# EAGLE board Arduino_S3v3_R2_ft2 (EAGLE 6.2)
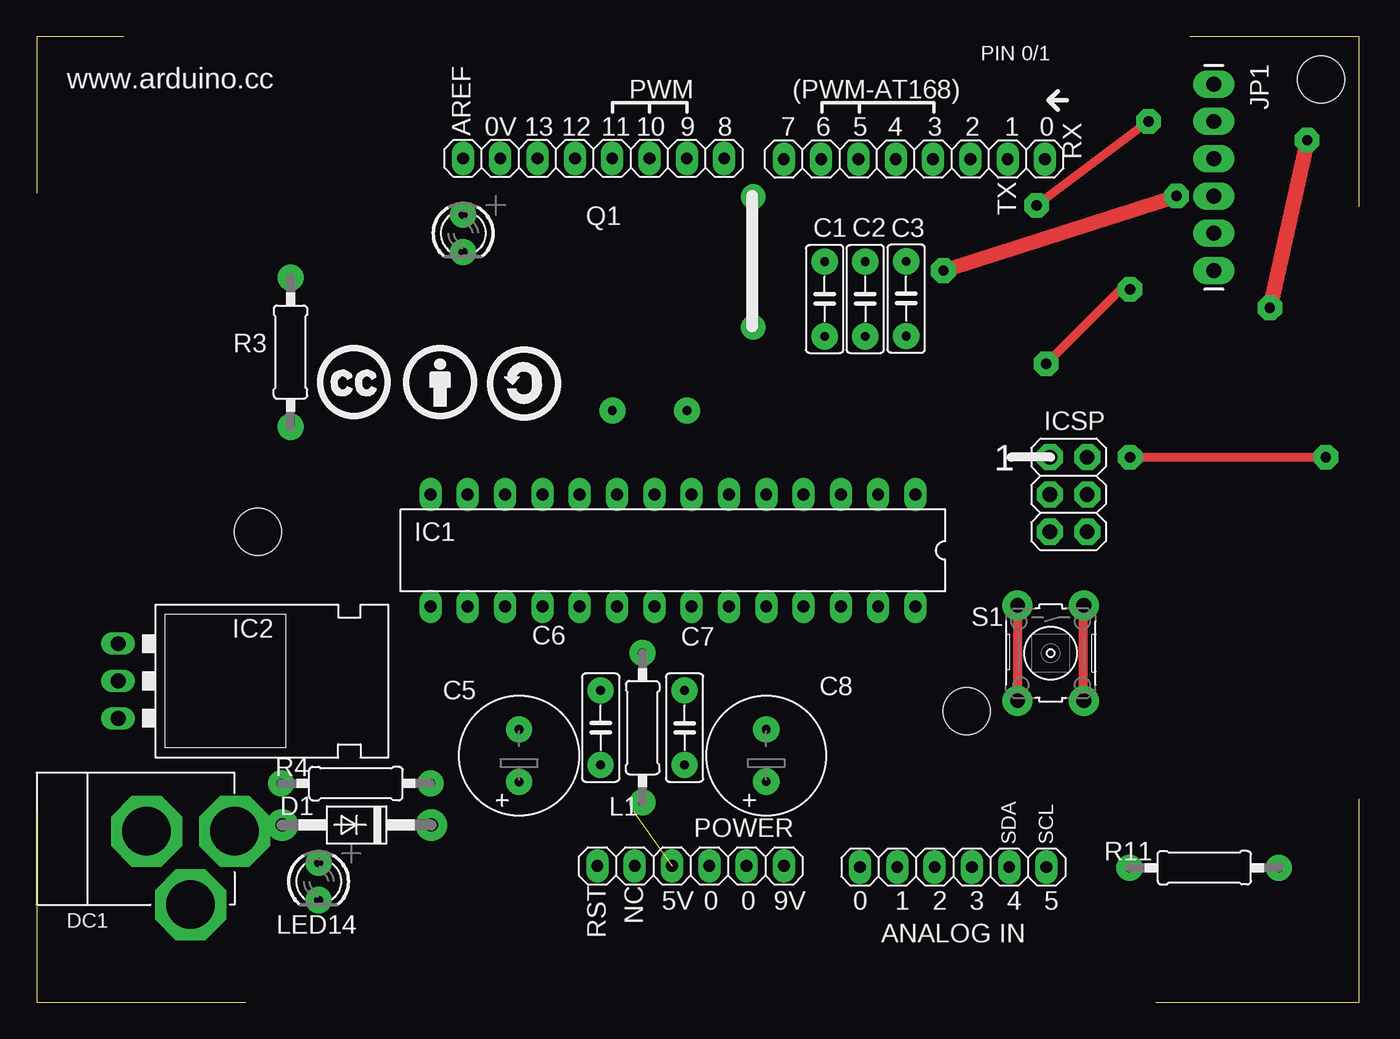
[diagram p0: board, top side]
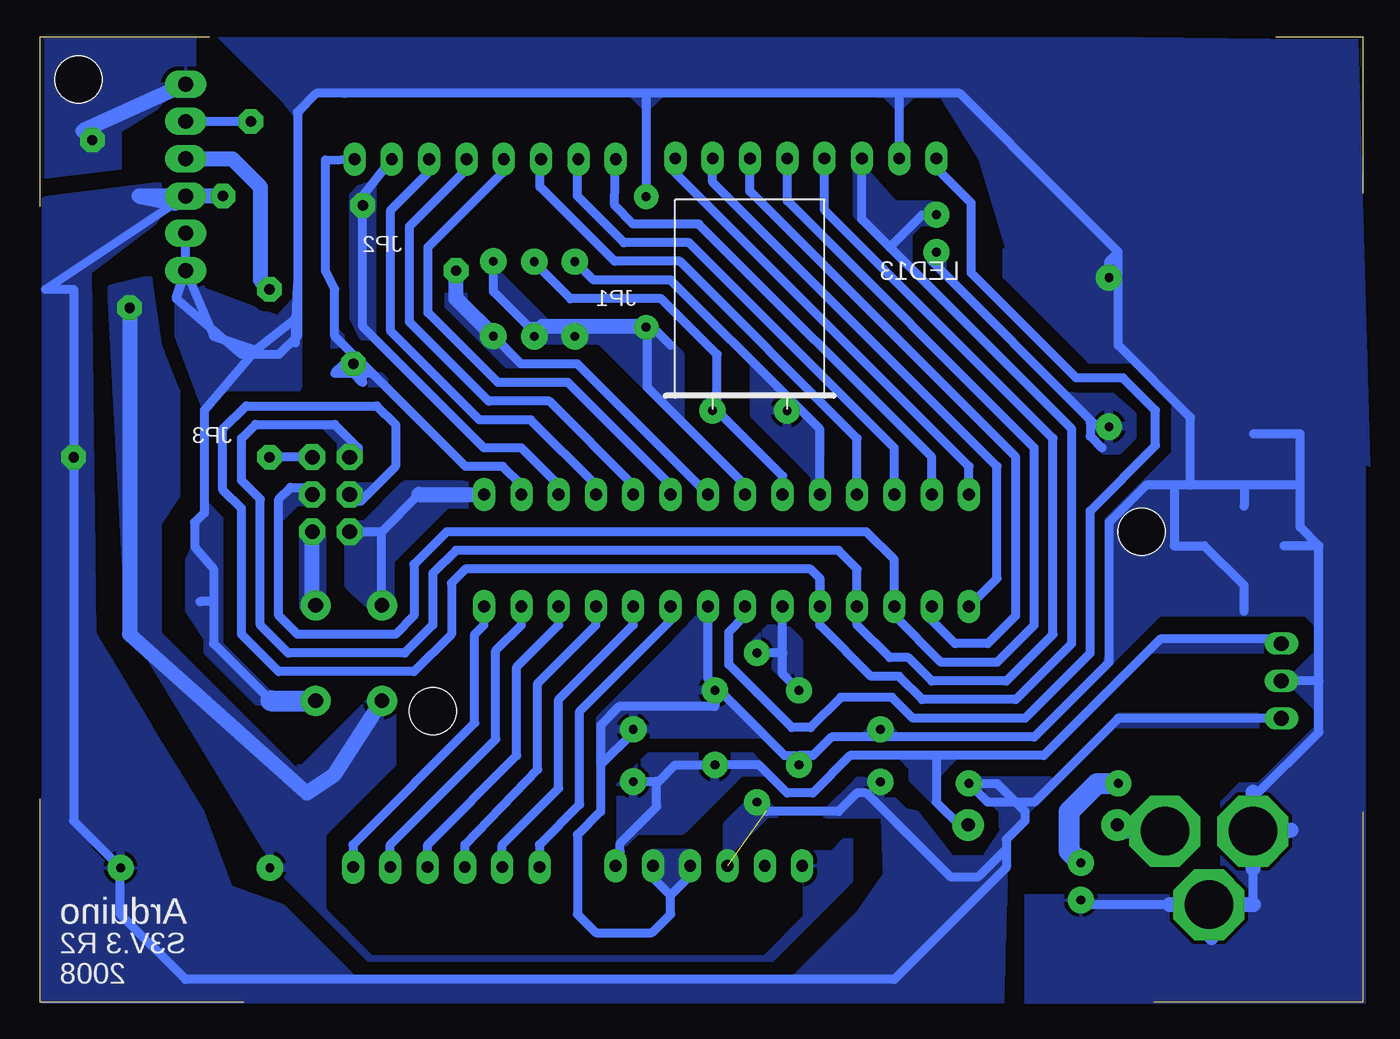
[diagram p1: board, bottom side, seen from below]

Size 90.06 x 65.74 mm. Coordinates in mm from the lower left corner, seen from the top.
Outline: 0.01,65.74 0.01,55.07
Outline: 0.01,12.95 0.01,0 14.23,0
Outline: 76.2,0 90.06,0
Outline: 90.05,65.73 78.5,65.73
Outline: 5.91,65.74 0,65.74
Outline: 90.06,0.01 90.06,13.85
Outline: 90.05,54.18 90.05,65.73
Copper layers (1*16): Top 0.035mm / dielectric 1.5mm / Bottom 0.035mm
Design rules: minimum track width 0.6mm, minimum drill 0.6mm, track to track 0.67mm, track to pad 0.67mm, pad to pad 0.67mm, via to via 0.67mm, smd to smd 0mil, copper to edge 0mil, drill to drill 8mil, minimum pad ring 10mil, minimum via ring 8mil, stop-mask expansion 0mil, vias tented up to drill 0mil, thermal gap 10mil
Net classes: 1 power: width 0.61 mm
Holes 3.2 mm at 87.45,62.83 63.32,19.81 15.06,32.03
bRestrict: 6 lines

## Footprints (pad centres in the part's own frame; a part is rotated, then mirrored left to right if it is on the bottom)
C050-025X075 = drill 0.6 pad 1.778: 1 -2.54,0; 2 2.54,0
E3,5-8 = drill 0.6 pad 1.778: + -1.778,0; - 1.778,0
DO41-10 = drill 0.9 pad 2.159: A 5.08,0; C -5.08,0
DC-21MM = drill 3.302 pad 4.826 octagon: 1 -5.08,-3.353; 2 -0.076,-6.35; 3 -0.076,-0.356
DIL28-3 = drill 0.813 pad 1.524 long: 1 -16.51,-3.81; 2 -13.97,-3.81; 3 -11.43,-3.81; 4 -8.89,-3.81; 5 -6.35,-3.81; 6 -3.81,-3.81; 7 -1.27,-3.81; 8 1.27,-3.81; 9 3.81,-3.81; 10 6.35,-3.81; 11 8.89,-3.81; 12 11.43,-3.81; 13 13.97,-3.81; 14 16.51,-3.81; 15 16.51,3.81; 16 13.97,3.81; 17 11.43,3.81; 18 8.89,3.81; 19 6.35,3.81; 20 3.81,3.81; 21 1.27,3.81; 22 -1.27,3.81; 23 -3.81,3.81; 24 -6.35,3.81; 25 -8.89,3.81; 26 -11.43,3.81; 27 -13.97,3.81; 28 -16.51,3.81
78XXL = drill 1.016 long: GND 0,-3.81; IN -2.54,-3.81; OUT 2.54,-3.81
2X03 = drill 1 pad 1.778 octagon: 1 -2.54,-1.27; 2 -2.54,1.27; 3 0,-1.27; 4 0,1.27; 5 2.54,-1.27; 6 2.54,1.27
1X08 = drill 0.8 pad 1.524 long: 1 -8.89,0; 2 -6.35,0; 3 -3.81,0; 4 -1.27,0; 5 1.27,0; 6 3.81,0; 7 6.35,0; 8 8.89,0
1X06 = drill 0.8 pad 1.524 long: 1 -6.35,0; 2 -3.81,0; 3 -1.27,0; 4 1.27,0; 5 3.81,0; 6 6.35,0
1X06_LONGPADS = drill 1.016 pad 1.88 long: 1 0,0; 2 2.54,0; 3 5.08,0; 4 7.62,0; 5 10.16,0; 6 12.7,0
0207/10 = drill 0.6 pad 1.778: 1 -5.08,0; 2 5.08,0
LED3MM = drill 0.6 pad 1.778: A -1.27,0; K 1.27,0
Q = drill 0.6 pad 1.778: 1 -2.54,-7.62; 2 2.54,-7.62
B3F-10XX = drill 1 pad 2.032: 1 -3.251,2.261; 2 3.251,2.261; 3 -3.251,-2.261; 4 3.251,-2.261

## Placement (x,y rotation side)
C1  22p  [C050-025X075]  56.41,47.88 90 top
C2  22p  [C050-025X075]  53.65,47.88 90 top
C3  100n  [C050-025X075]  59.2,47.9 90 top
C5  100u  [E3,5-8]  32.84,16.79 90 top
C6  100n  [C050-025X075]  38.4,18.7 270 top
C7  100n  [C050-025X075]  44.11,18.69 270 top
C8  100u  [E3,5-8]  49.67,16.79 90 top
D1  1N4004  [DO41-10]  21.79,12.07 180 top
DC1  DC21MMX  [DC-21MM]  7.12,11.71 90 top
IC1  ATMEGA8 (OR 168)  [DIL28-3]  43.32,30.76 180 top
IC2  [78XXL]  9.35,21.87 270 top
ICSP  ICSP  [2X03]  70.25,34.57 270 top
J1  PORT D(D0-D7)  [1X08]  59.75,57.41 180 top
J2  PORT C(A0-A5)  [1X06]  62.4,9.2 0 top
J3  PORT B(D8-D13)  [1X08]  37.91,57.45 180 top
JP1  [1X06_LONGPADS]  80.15,62.51 270 top
L1  100uH  [0207/10]  41.25,18.7 270 top
LED13  L  [LED3MM]  29.03,52.35 270 top
LED14  POWER LED  [LED3MM]  19.19,8.22 270 top
POWER  [1X06]  44.52,9.28 0 top
Q1  16000  [Q]  41.73,47.91 0 bottom
R3  1k  [0207/10]  17.28,44.26 270 top
R4  1k  [0207/10]  21.73,14.89 0 top
R11  10k  [0207/10]  79.49,9.16 0 top
S1  [B3F-10XX]  69.04,23.77 270 top
U$1  [CC]  19.03,39.65 0 top
U$2  [BY]  24.9,39.65 0 top
U$3  [SA]  30.62,39.65 0 top

## Library data of the parts
C1-C3 C5-C8 L1 R3 R4 R11 = rcl
D1 = diode
DC1 = powersupply
IC1 = atmel
IC2 = v-reg
ICSP J1-J3 POWER = pinhead
JP1 = SparkFun
LED13 LED14 = led
Q1 = special
S1 = switch-omron
U$1-U$3 = CC

## Nets
+5V [power]: C3.1 C5.+ IC1.7 IC2.OUT ICSP.2 JP1.4 L1.2 POWER.3 R4.2 R11.2
AREF: IC1.21 J3.8
GND: C1.1 C2.1 C3.2 C5.- C6.2 C7.1 C8.- DC1.1 DC1.3 IC1.8 IC1.22 IC2.GND ICSP.6 J3.7 JP1.5 JP1.6 LED14.K POWER.4 POWER.5 R3.1 S1.1 S1.2
M8RXD: IC1.2 J1.1 JP1.3
M8TXD: IC1.3 J1.2 JP1.2
N$1: IC1.18 ICSP.1 J3.5
N$3: LED14.A R4.1
N$4: IC1.17 ICSP.4 J3.4
N$5: IC1.14 J3.1
N$6: C1.2 IC1.9 Q1.1
N$7: C2.2 IC1.10 Q1.2
N$8: D1.A DC1.2
N$10: IC1.4 J1.3
N$11: IC1.5 J1.4
N$12: IC1.6 J1.5
N$13: IC1.11 J1.6
N$14: IC1.12 J1.7
N$15: IC1.13 J1.8
N$16: IC1.23 J2.1
N$17: IC1.24 J2.2
N$18: IC1.25 J2.3
N$19: IC1.26 J2.4
N$20: IC1.27 J2.5
N$21: IC1.28 J2.6
N$22: IC1.15 J3.2
N$23: IC1.16 J3.3
N$31: LED13.K R3.2
N$42 [power]: C6.1 IC1.20 L1.1
RESET: IC1.1 ICSP.5 JP1.1 POWER.1 R11.1 S1.3 S1.4
SCK: IC1.19 ICSP.3 J3.6 LED13.A
VIN [power]: C7.2 C8.+ D1.C IC2.IN POWER.6

## Tracks (layer width: path | path; a pad name or v marks a point on that pad's centre or on a via)
+5V  (via drill 0.7 pad 1.68)  (1 unrouted)
  Top 0.61: v74.43,37.11 v87.77,37.11
  Top 1.016: v61.73,49.81 v77.61,54.89
  Bottom 0.61: IC1.7 53.48,43.46 57.3,43.46 C3.1 | JP1.4 80.88,54.4 89.67,48.54 87.77,48.54 v87.77,37.11 87.77,12.36 R11.2 84.59,9.13 84.59,6 80.15,1.55 31.89,1.55 24.27,9.17 24.27,10.44 | IC2.OUT 16.65,19.33 22.36,13.62 25.54,13.62 R4.2 24.9,14.89 23,12.98 23,12.35 24.27,11.08 24.27,10.44 | L1.2 40.62,12.98 35.7,12.98 34.43,14.25 33.79,14.25 28.08,8.54 26.17,8.54 24.27,10.44 | ICSP.2 v74.43,37.11
  Bottom 1.016: C3.1 61.73,47.91 v61.73,49.81 | v77.61,54.89 83.32,54.89 80.88,54.4
  pour Bottom: 24.11,11.87 24.27,12.35 25.86,9.97 27.92,9.97 30.3,12.98 32.84,13.62 32.68,8.7 34.43,6.16 39.03,1.55 68.4,1.55 73.48,6.63 76.97,7.9 78.88,12.98 86.5,25.37 85.55,12.98 84.59,9.81 85.23,9.17 89.99,13.94 89.99,-0.04 24.43,-0.04
  pour Bottom (no thermals): 7.12,18.7 17.6,18.7 16.65,19.65 7.12,19.65
  pour Bottom: 89.67,12.98 84.59,9.81 80.78,11.08 82.69,18.7 86.5,25.05 86.82,49.81 80.15,54.89 82.05,55.53 89.67,54.58
  pour Bottom (no thermals): 59.19,45.37 57.29,43.46 58.24,43.46 62.21,47.43 62.21,50.13 61.26,50.13 61.26,47.75 59.19,45.69
  pour Bottom: 31.09,12.82 33.32,15.05 34.35,15.05 36.57,12.82
  pour Bottom (no thermals): 39.98,12.82 40.62,12.82 43.24,10.2 43.24,12.11 41.25,14.09
  pour Bottom: 24.27,12.03 24.27,13.14 26.01,14.89 21.41,14.89
  pour Bottom: 82.05,53.62 82.69,54.89 82.69,55.53
AREF
  Bottom 0.6: IC1.21 42.05,26.64 42.05,26.32 43.16,25.21 43.16,22.98 41.25,21.08 38.87,18.7 37.6,18.7 35.54,20.76 32.05,20.76 30.62,19.33 23,19.33 18.55,23.78 18.55,33.46 14.11,37.91 14.11,40.29 16.33,42.51 19.5,42.51 26.65,49.65 26.65,54.42 28.71,56.48 28.71,57.43 J3.8
GND  (via drill 0.6 pad 1.68, 1 pad 2.03)
  Top 0.6: 48.72,54.85 48.72,45.96 v48.79,45.96 | 48.72,54.85 48.72,54.89 | v48.79,54.85 48.72,54.85 | 71.26,20.6 S1.2 | 71.26,20.6 71.26,26.95 S1.1 | S1.2 71.26,20.6
  Bottom 0.6: 74.43,20.6 78.24,24.41 78.24,27.27 | 79.51,32.67 78.88,33.3 78.88,40.29 75.39,44.41 72.53,46.64 72.53,48.86 72.69,44.89 | 79.51,32.67 79.51,31 78.24,29.49 78.24,27.27 | 42.05,35.21 | 42.05,35.21 48.72,41.87 48.72,46 48.75,46 v48.79,45.96 | 48.79,61.88 v48.79,54.85 | 4.26,35.21 4.26,38.7 | 11.73,35.21 11.73,39.81 16.65,44.73 16.65,51.08 | 20.46,54.89 27.44,61.88 31.57,61.88 | J3.7 31.57,57.12 31.57,61.88 | 31.57,61.88 48.79,61.88 | 4.26,35.21 8.07,35.21 | 8.07,35.21 11.73,35.21 | 11.73,35.21 12.84,35.21 | 2.99,21.87 2.99,31.08 | 2.99,31.08 4.26,32.35 4.26,35.21 | 78.24,27.27 79.16,27.27 | 13.16,6.64 10.5,6.64 | 13.16,6.64 13.47,6.63 19.19,6.64 LED14.K | 44.11,20.13 50.62,20.13 51.89,18.86 51.89,16.16 | 51.89,16.16 51.89,12.98 53.48,11.4 53.48,6 52.21,4.73 48.4,4.73 47.13,6 47.13,7.27 | 2.99,21.87 IC2.GND | 10.3,6.63 13.16,6.64 | 7.44,6.63 7.44,11.71 7.47,13.62 | 2.99,21.87 2.99,18.38 7.44,13.94 7.47,13.62 | 7.47,13.62 7.48,14.29 | 74.43,20.6 74.43,20.58 | 74.43,20.6 74.35,20.52 | 71.3,26.95 71.26,26.95 71.52,27.22 | 47.13,7.27 48.4,8.54 48.4,9.17 48.33,9.17 POWER.5 | POWER.4 45.79,8.61 47.13,7.27 | 47.13,44.73 48.4,46 | 48.79,61.88 69.35,61.88 | 79.51,32.67 79.53,32.67 | 12.84,35.21 14.74,35.21 17.28,32.67 17.28,23.14 22.36,18.06 32.84,18.06 | 12.84,35.21 12.84,31.08 10.77,31.08 | 2.99,31.08 5.38,31.08 | 8.07,35.21 8.07,33.78 | 8.07,26.64 8.07,28.38 | 32.84,18.06 36.17,18.06 37.44,16.79 38.4,16.79 C6.2 38.4,16.79 39.34,16.79 43.95,21.4 | C5.- 32.84,18.06 | 55.86,46 56.81,46 59.19,48.39 59.19,50.13 59.19,50.28 C3.2 | 43.95,21.4 44.43,21.87 44.46,21.87 44.11,20.6 44.11,20.13 | C7.1 44.11,20.92 44.11,20.13 | C8.- 49.67,18.38 51.89,16.16
  Bottom 0.6: 43.95,21.4 | IC1.22 44.59,22.03 43.95,21.4 | 53.64,46 53.64,45.84 53.65,45.83 C2.1 | 42.05,35.21 IC1.8
  Bottom 0.61: 8.07,28.38 10.77,31.08 | 4.26,38.7 7.44,38.7 | JP1.6 JP1.5 | R3.1 17.28,50.45 16.65,51.08 20.46,54.89 | JP1.6 78.24,45.37 75.39,44.41 | 69.35,61.88 71.26,61.88 72.53,60.61 72.53,45.37 73.8,44.1 76.34,44.1 80.78,47.91 JP1.6
  Bottom 1.016: 7.48,14.29 7.48,9.11 | S1.1 71.3,26.95 | 71.52,27.22 ICSP.6 | 4.9,11.71 7.44,11.71 9.35,11.71 | 7.44,6.63 10.3,6.63 | 10.3,6.63 13.16,6.63 | 10.3,6.63 10.3,4.41 | 56.49,45.37 55.87,45.99 | 55.87,45.99 55.86,46 | 48.72,46 53.64,46 55.87,45.99
  Bottom 1.422: 74.35,20.52 S1.2
  other vias: 71.3,20.52
  pour Bottom: 11.25,7.27 23,7.27 23,-0.04 -0.18,-0.04 -0.18,42.83 3.31,41.24 4.9,41.88 5.85,42.19 10.93,42.19 15.54,46.16 18.08,46.16 13,41.08 13,37.43 17.6,32.83 17.6,22.51 13.79,26.32 3.95,26.32 3.31,25.68 3.31,18.7 7.12,14.89 8.39,14.89 9.66,13.62 9.66,8.86
  pour Bottom: 46.49,44.1 46.49,39.65 52.84,46 48.4,46
  pour Bottom: 47.76,61.88 48.79,60.92 49.75,61.88
  pour Bottom: 30.62,61.88 31.57,60.92 32.52,61.88
  pour Bottom (no thermals): 45.7,10.12 48.4,10.12 48.4,8.86 47.13,7.58 45.7,9.01
  pour Bottom: 16.65,7.27 19.98,7.27 19.98,3.46 19.03,2.5 16.65,2.5
  pour Bottom (no thermals): 4.58,22.51 2.68,24.41 2.68,19.33 4.58,21.24
  pour Bottom (no thermals): 70.62,31.71 70.62,26.79 70.78,26.64 72.21,26.64 72.37,26.79 72.37,31.71
  pour Bottom: 24.27,51.08 24.27,49.49 18.55,43.78 15.7,43.78 16.65,44.73 16.65,52.67 18.24,51.08
  pour Bottom: 74.43,21.24 77.61,24.41 77.61,32.98 78.88,34.25 79.51,31.4 80.15,30.13 80.15,26.64 78.88,24.73 78.88,23.78 75.39,20.29 74.43,20.29
  pour Bottom: 72.53,47.91 72.53,43.78 72.53,41.88 77.93,41.88
  pour Bottom (no thermals): 59.19,49.81 55.54,46.16 52.84,46.16 51.73,45.05 55.86,45.05 59.19,48.38
  pour Bottom: 51.89,19.33 46.97,24.25 44.59,24.25 44.59,22.03 40.78,18.22 49.83,18.22 51.89,16.16
  pour Bottom (no thermals): 46.97,24.25 44.59,26.79 44.59,24.25
  pour Bottom (no thermals): 32.84,19.17 31.73,18.06 33.95,18.06
  pour Bottom (no thermals): 73.64,61.4 72.53,59.97 70.94,62.2 28.71,61.56 26.17,57.43 24.27,51.08 22.36,51.08 12.84,42.19 -0.5,36.48 0.3,65.53 3.47,65.53 15.06,65.69 77.93,65.69
  pour Bottom: 78.88,40.29 80.78,45.37 80.78,49.81 79.51,49.81 78.88,48.54 73.8,46.64
M8RXD  (via drill 0.7 pad 1.68)
  Top 0.61: v74.43,48.54 73.8,48.54 v68.72,43.46
  Bottom 0.61: IC1.2 57.29,35.21 58.56,36.48 61.1,36.48 67.45,42.83 | 67.45,42.83 69.99,45.37 69.99,48.54 70.62,49.81 70.62,57.33 J1.1 | v68.72,43.46 68.72,42.83 | v68.72,43.46 68.08,42.83 68.08,42.19 68.72,42.83 | v68.72,43.46 69.35,43.46 69.99,42.83 68.72,42.83 | 68.72,42.83 67.45,42.83
  Bottom 1.016: JP1.3 76.97,57.43 75.07,55.53 75.07,49.18 v74.43,48.54
  pour Bottom: 69.99,45.69 69.99,43.15 69.04,42.19 66.5,42.19
M8TXD  (via drill 0.7 pad 1.68)
  Top 0.61: v75.7,59.97 v68.08,54.26
  Bottom 0.61: IC1.3 54.75,35.21 57.29,37.75 59.83,37.75 68.08,46 68.08,53.62 v68.08,54.26 68.08,54.89 J1.2 | JP1.2 v75.7,59.97
  pour Bottom: 68.08,45.37 68.72,46.64 68.72,54.89 68.08,55.53 67.45,55.53 67.45,45.37
N$1
  Bottom 0.6: ICSP.1 68.4,37.11 68.4,37.75 69.99,39.34 75.39,39.34 76.34,38.38 76.34,35.52 75.07,34.25 75.07,25.68 73.16,23.78 65.23,23.78 63.32,25.68 63.32,29.18 61.73,30.76 35.7,30.76 34.43,29.49 IC1.18 34.43,25.68 32.21,23.46 30.93,23.46 29.35,21.87 24.27,21.87 21.09,25.05 21.09,38.38 36.64,53.93 J3.5
  pour Bottom (no thermals): 68.4,37.43 68.4,37.75 69.99,39.34 71.1,39.34 69.83,38.06 69.83,37.43
N$2  (via drill 0.7 pad 1.68)
  other vias: 61.73,49.81
N$3  (1 unrouted)
  Bottom 0.6: R4.1
  Bottom 1.422: R4.1 18.08,14.89 19.98,12.98 19.98,10.28 LED14.A
N$4
  Bottom 0.6: ICSP.4 71.58,35.05 73,35.05 73.8,34.25 73.8,26.32 72.53,25.05 65.86,25.05 64.59,26.32 64.59,29.81 62.37,32.03 33.79,32.03 31.89,30.13 IC1.17 31.89,26.32 28.71,23.14 24.9,23.14 22.36,25.68 22.36,37.75 39.18,54.57 J3.4
  pour Bottom (no thermals): 71.89,33.78 72.53,33.78 73.64,32.67 73.64,34.25 73,34.89 72.37,34.89 71.89,35.37
N$5
  Bottom 0.6: IC1.14 26.81,36.48 46.81,56.48 46.81,57.12 J3.1
N$6
  Bottom 0.6: IC1.9 39.51,35.84 43.95,40.29 | 43.95,40.29 Q1.1 | 43.95,40.29 43.95,44.1 47.76,47.91 53.95,47.91 56.49,50.45 C1.2
  pour Bottom (no thermals): 44.27,39.65 43,39.65 43.95,40.6 43.95,41.88 44.91,40.92 44.91,40.29
N$7
  Bottom 0.6: 38.87,40.92 39.83,41.88 | 38.87,40.92 47.13,49.18 52.37,49.18 53.64,50.45 53.65,50.45 C2.2 | IC1.10 36.97,39.02 38.87,40.92 | 38.87,40.92 Q1.2
  pour Bottom: 36.97,37.11 38.56,37.11 41.41,39.97 41.41,43.46 36.97,39.02
  pour Bottom (no thermals): 38.56,37.11 37.29,35.84 37.29,35.05 36.97,35.05 36.97,37.11
N$8
  Bottom 0.6: 16.65,12.03 16.65,12.07
  Bottom 1.016: 16.65,12.07 D1.A | DC1.2 16.25,11.64 16.65,12.03
N$9  (via drill 0.7 pad 1.68)
  other vias: 68.72,43.46
N$10
  Bottom 0.6: IC1.4 52.21,35.21 56.65,39.65 60.15,39.65 66.18,45.68 66.18,53.94 63.64,56.48 63.64,57.43 J1.3
N$11
  Bottom 0.6: IC1.5 49.67,35.21 55.38,40.92 59.51,40.92 64.91,46.32 64.91,52.83 61.1,56.64 61.1,57.43 J1.4
N$12
  Bottom 0.6: IC1.6 47.13,35.21 54.11,42.19 58.87,42.19 63.64,46.95 63.64,51.4 58.56,56.48 58.56,57.43 J1.5
N$13
  Bottom 0.6: IC1.11 34.43,38.38 46.49,50.45 50.94,50.45 56.02,55.53 56.02,57.41 | 56.02,57.41 56.02,57.43 | 56.02,57.41 J1.6
N$14
  Bottom 0.6: IC1.12 31.89,37.75 45.86,51.72 50.3,51.72 53.48,54.89 53.48,57.41 | 53.48,57.41 53.48,57.43 | 53.48,57.41 J1.7
N$15
  Bottom 0.6: IC1.13 29.35,37.11 45.22,52.99 49.67,52.99 50.94,54.26 J1.8
N$16
  Bottom 0.6: IC1.23 47.13,26 53.32,19.81 53.32,13.46 56.05,10.73 J2.1
N$17
  Bottom 0.6: IC1.24 49.67,25.68 54.75,20.6 54.75,14.57 58.59,10.73 J2.2
N$18
  Bottom 0.6: IC1.25 52.21,25.68 56.18,21.71 56.18,15.84 61.13,10.73 J2.3
N$19
  Bottom 0.6: IC1.26 54.75,25.68 57.61,22.82 57.61,16.79 63.67,10.73 J2.4
N$20
  Bottom 0.6: IC1.27 57.29,25.68 59.03,23.94 59.03,17.9 66.21,10.73 J2.5
N$21
  Bottom 0.6: IC1.28 59.83,25.68 60.46,25.05 60.46,19.02 68.75,10.73 J2.6
N$22
  Bottom 0.6: IC1.15 24.9,28.86 24.9,36.48 44.27,55.84 44.27,57.12 J3.2
N$23
  Bottom 0.6: IC1.16 29.35,26 27.76,24.41 25.54,24.41 23.63,26.32 23.63,37.11 41.73,55.21 41.73,57.12 | 41.73,57.12 41.73,57.43 | 41.73,57.12 J3.3
N$31
  Bottom 0.6: 18.24,39.34 29.35,50.45 29.35,51.08 LED13.K | R3.2 | R3.2 | R3.2 17.28,39.34 18.24,39.34 | 17.76,37.75 18.55,38.54 18.55,39.49 18.39,39.34 18.24,39.34
  pour Bottom (no thermals): 28.4,51.08 28.4,49.49 29.35,50.45 29.35,51.08
  pour Bottom: 15.7,38.54 15.7,39.97 17.12,41.24 20.14,41.24 18.55,39.65 18.55,38.54 17.6,37.59 16.65,37.59
N$42
  Bottom 0.6: 39.51,23.78 39.51,22.35 C6.1 | 39.51,23.78 IC1.20 | 39.51,23.78 | 39.51,23.78 L1.1
  pour Bottom: 38.4,21.24 38.4,24.57 39.51,25.68 39.51,26.32 41.41,24.41 41.41,24.25
RESET  (via drill 0.7 pad 1.68)
  Top 0.6: S1.3 66.81,26.95 66.81,20.6 S1.4
  Top 1.016: v86.5,58.7 v83.96,47.27
  Bottom 0.6: 66.81,32.03 64.27,34.57 | 66.81,32.03 ICSP.5 | S1.3 66.78,26.95 66.81,26.95 66.81,32.03
  Bottom 1.016: 64.27,34.57 IC1.1 | JP1.1 87.13,59.34 v86.5,58.7 | v83.96,47.27 83.96,25.05 71.89,14.25 69.99,15.52 S1.4
  pour Bottom: 72.53,16.16 72.53,10.76 73.16,9.49 74.43,9.49 67.77,2.82 40.14,2.82 34.75,8.22 34.75,11.08 35.38,11.08 36.17,10.28 38.08,10.28 38.08,5.84 40.78,3.14 67.45,3.14 70.62,6.32 70.62,11.39 66.5,15.52
  pour Bottom: 65.23,31.08 62.37,33.94 60.15,33.94 60.15,35.21 65.23,35.21
  pour Bottom: 66.5,15.52 65.86,16.16 65.86,20.6 67.77,20.6 72.53,15.84 72.53,15.52
  pour Bottom (no thermals): 65.23,35.21 67.92,32.51 69.04,32.51 69.04,28.38 67.13,26.64 66.18,26.64 66.18,30.13 65.23,31.08
  pour Bottom: 85.23,48.54 83.96,25.05 82.69,23.78 73.8,9.17 73.16,8.54 71.26,11.71 72.53,15.52 82.05,25.05 82.05,32.67 80.78,34.57 80.78,41.56 82.05,44.73 82.69,49.18
  pour Bottom: 89.67,65.69 89.67,56.16 84.59,56.8 84.59,59.34 79.51,62.51 79.51,65.69
SCK
  Bottom 0.6: 36.97,28.86 IC1.19 | 36.97,28.86 37.6,29.49 61.1,29.49 62.05,28.54 62.05,25.05 64.59,22.51 73.8,22.51 76.34,25.05 76.34,33.62 77.61,34.89 77.61,39.02 76.02,40.6 67.13,40.6 65.86,39.34 65.86,36.48 67.76,34.57 68.24,34.1 68.88,34.1 68.88,34.57 ICSP.3 | 36.97,28.86 36.97,25.68 33.48,22.19 31.57,22.19 29.98,20.6 23.63,20.6 19.82,24.41 19.82,39.02 32.21,51.4 | 32.21,51.4 34.11,53.3 | J3.6 34.11,57.43 34.11,53.3 | 34.11,53.3 34.11,53.62 | LED13.A 29.98,53.62 32.21,51.4
  pour Bottom (no thermals): 30.94,50.13 30.94,52.35 30.14,53.15 29.03,53.15 29.03,53.94 29.35,54.26 31.89,54.26 34.43,57.12 34.43,53.62
  pour Bottom (no thermals): 68.4,33.78 66.81,35.37 69.35,35.37 69.35,33.78
VIN
  Bottom 0.6: IC2.IN 6.17,24.73 13.79,24.73 21.73,16.79 29.03,16.79 | D1.C 27.48,12.07 29.03,13.62 29.03,16.79 | C7.2 41.09,16.16 39.19,14.25 37.44,14.25 34.9,16.79 29.03,16.79 | 48.08,15.01 47.95,15.01 46.81,16.16 C7.2 | 48.08,15.01 C8.+ | POWER.6 50.87,9.56 50.54,9.89 50.55,10.83 48.08,13.3 48.08,15.01 | 48.08,15.01 48.08,15.05
  pour Bottom (no thermals): 6.81,23.78 14.74,23.78 13.79,24.73 6.81,24.73
  pour Bottom: 41.65,16.71 48.56,16.71 50.54,14.73 50.54,10.6 49.43,11.71 46.33,11.71 42.37,15.68 40.62,15.68
  pour Bottom: 27.76,16.79 29.03,15.52 29.03,13.62 30.62,15.21 30.62,16 31.41,16.79

## Text on the board
tNames: PIN 0/1 | www.arduino.cc | PWM | (PWM-AT168) | AREF | 0V | 13 | 12 | 11 | 10 | 9 | 8 | 7 | 6 | 5 | 4 | 3 | 2 | 1 | 0 | RX | TX | 1 | SDA | SCL | 5V | 0 | 0 | 9V | 0 | 1 | 2 | 3 | 4 | 5 | NC | RST | ANALOG IN
bNames: JP2 | LED13 | JP1 | JP3 | Arduino | S3V.3 R2 | 2008
bValues: ENABLE
bRestrict: Arduino | R.2 | V.3 | S3 | Pin0/1 | 2008 | REF | GND | SERIAL | ON | www.arduino.cc | AKASHI | A. | BANZI | M. | AUTO | CUARTIELLES | D. | CC BY SA 2.5 | RESET | ENABLE | MARTINO | G. | IGOE | T. | ZAMBETTI | N. | MELLIS | D.
tCredits: ADILSON AKASHI | MASSIMO BANZI | DAVID CUARTIELLES | TOM IGOE | GIANLUCA MARTINO | DAVID A. MELLIS | NICHOLAS ZAMBETTI | Released under the Creative Commons Attribution Share-Alike 2.5 License | http://creativecommons.org/licenses/by-sa/2.5/
Cooper Text: A | 0 | 13 | 12 | 11 | 10 | 9 | 8 | 7 | 6 | 5 | 4 | 3 | 2 | 1 | 0 | 1 | R | 5 | 0 | 0 | 9 | 0 | 1 | 2 | 3 | 4 | 5 | Analog in
bCredits: ADILSON AKASHI | MASSIMO BANZI | DAVID CUARTIELLES | TOM IGOE | GIANLUCA MARTINO | DAVID A. MELLIS | NICHOLAS ZAMBETTI | Released under the Creative Commons Attribution Share-Alike 2.5 License | http://creativecommons.org/licenses/by-sa/2.5/